# Altium PCB PCB2.PcbDoc
Units mil, origin at the board's own origin, x right, y up, seen from the top; angles counter-clockwise.
Board outline 3150 x 2559.06 mil, 2 copper layers (Top Layer, Bottom Layer); 69 components, 56 nets, 220 pads, 25 vias.
Unrouted connection lines stored in the file: 2.
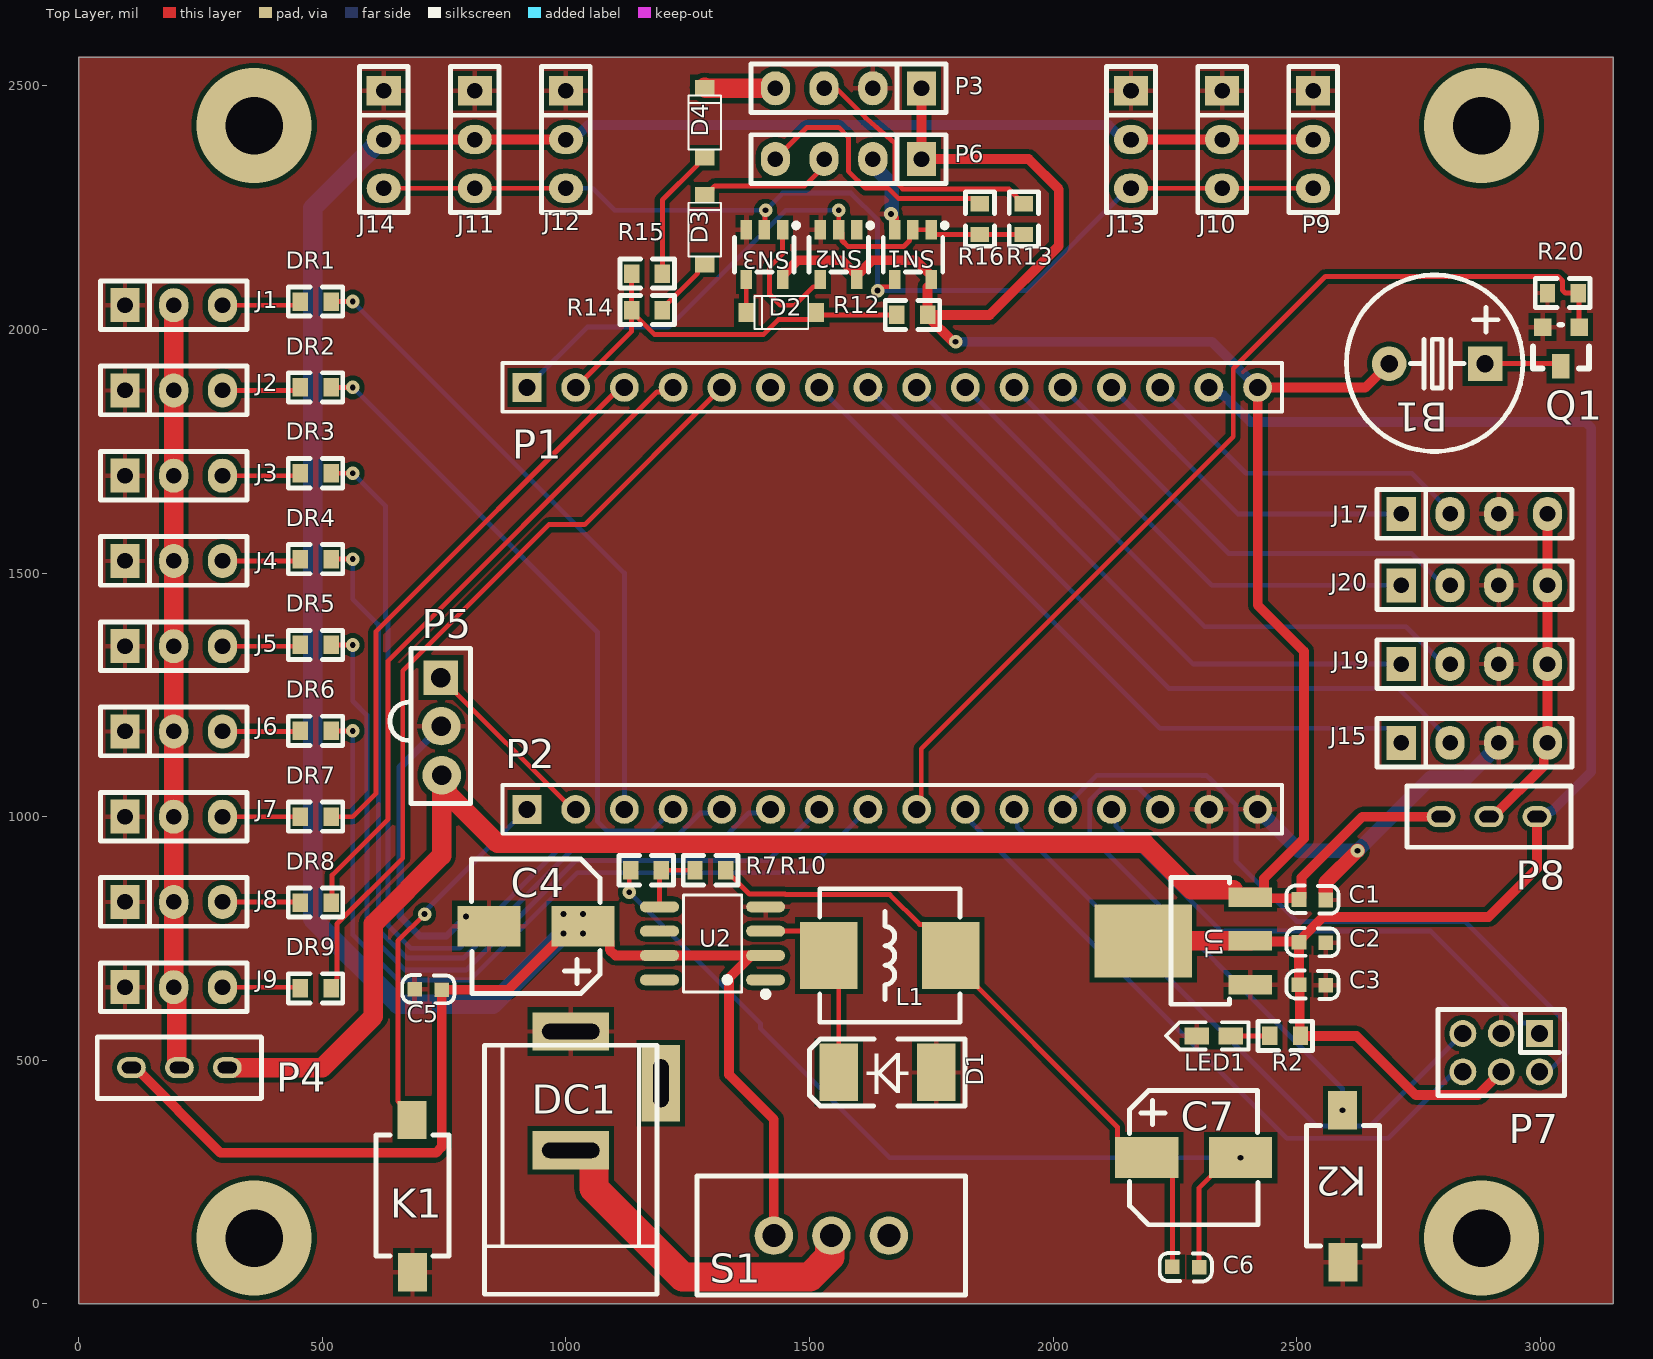
[diagram p0: Top Layer view]
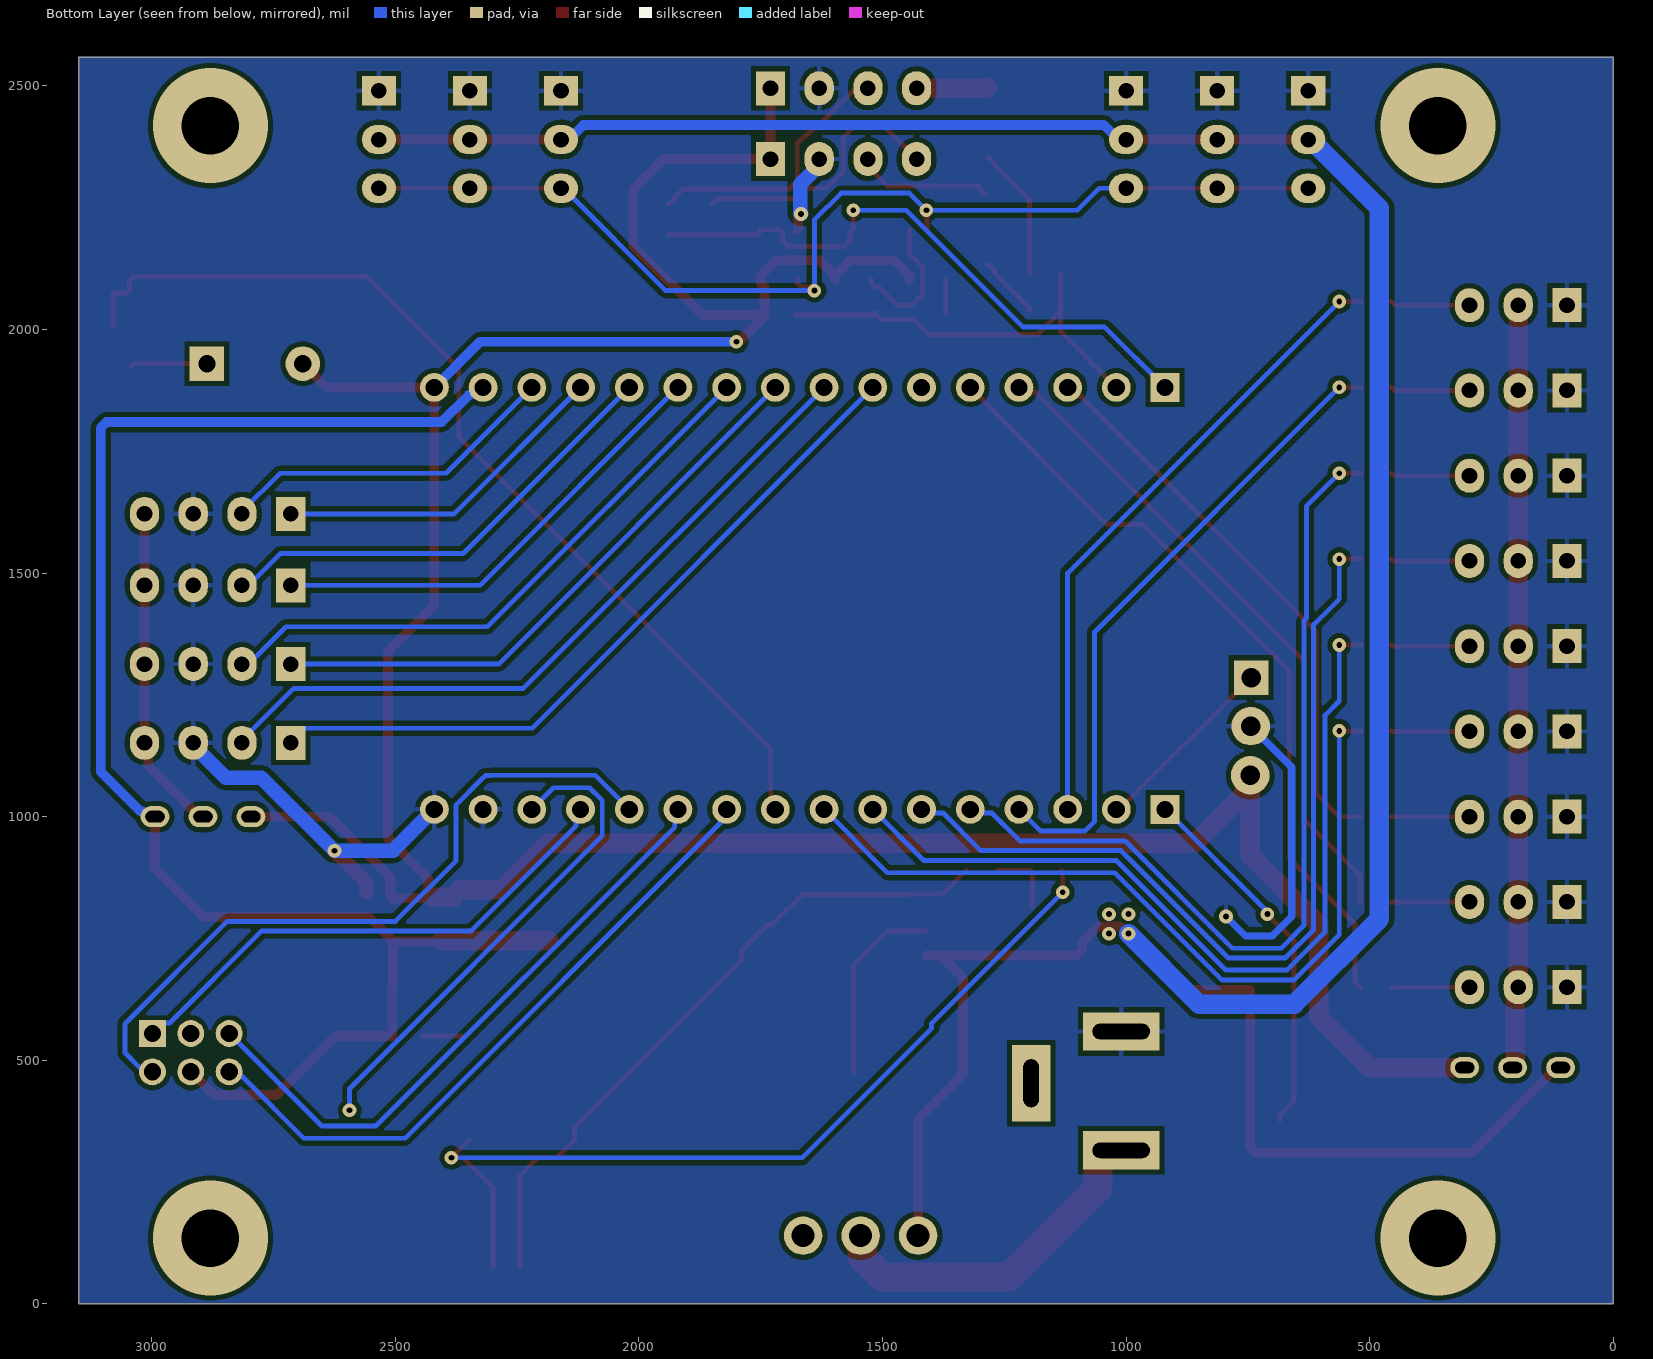
[diagram p1: Bottom Layer view, seen from below]

## Layer stack, top to bottom
Top Solder: solder mask 0.4, Solder Resist, Dk 3.5
Top Layer: signal copper 1.4
Dielectric 1: dielectric 12.6, FR-4, Dk 4.8
Bottom Layer: signal copper 1.4
Bottom Solder: solder mask 0.4, Solder Resist, Dk 3.5

## Board outline
0,0 0,2559.05 3150,2559.06 3150,0

## Design rules (kind name [scope] priority, off if disabled: settings)
Clearance [All] p1: gap=10 ignorepadtopadclearanceinfootprint=FALSE except(0: Arc-Hole Track-Hole SMDPad-Hole THPad-Hole Via-Hole Fill-Hole Poly-Hole Region-Hole Text-Hole)
PolygonConnect [All] p1: connectstyle=Relief reliefconductorwidth=10 reliefentries=4 polygonreliefangle="90 Angle" airgapwidth=10
RoomDefinition Sheet2 [InComponentClass('Sheet2')] p1: confinementstyle=ConfineIn formatcopy=TRUE lockcomponents=FALSE outline -1410,-2065 590,-2065 590,-1065 -1410,-1065
RoutingVias [All] p1: holewidth=28 width=50 viastyle="Through Hole" minholewidth=28 minwidth=50 maxholewidth=28 maxwidth=50
SolderMaskExpansion [All] p1: expansion=4 istentingtop=FALSE
Width [InNetClass('PWR')] p1: maxlimit=20 minlimit=20 preferedwidth=20
30 further rules are at their usual default settings.

## Components (designator, comment, footprint, x,y, rotation, side; value= is the part's Value field where it differs from the comment)
B1 "BEEP" "BEEP 5x9x5.5" 2886.85,1930 r180 top
C1 "104" 0603C 2560.21,828.65 r180 top
C2 "104" 0603C 2560.21,741.15 r180 top
C3 "104" 0603C 2560.21,653.65 r180 top
C4 "220uf" SMD-EC6.3X6.3X10 1035.82,775.02 r180 top
C5 "104" 0603C 745.21,644.65 r180 top
C6 "104" 0603C 2244.79,76.35 r0 top
C7 "220uf" SMD-EC6.3X6.3X10 2191.27,299.98 r0 top
D1 "SS34" SMA/DO-214AC 1755,475 r180 top
D2 "B5819W" SOD-123 1512.5,2035 r180 top
D3 "B5819W" SOD-123 1285,2135 r90 top
D4 "B5819W" SOD-123 1285,2355 r90 top
DC1 "DC_Socket" DC-005 1010,559.09 r270 top
DR1 "1K" 0603R 455,2057.5 r0 top
DR2 "1K" 0603R 455,1881.25 r0 top
DR3 "1K" 0603R 455,1705 r0 top
DR4 "1K" 0603R 455,1528.75 r0 top
DR5 "1K" 0603R 455,1352.5 r0 top
DR6 "1K" 0603R 455,1176.25 r0 top
DR7 "1K" 0603R 455,1000 r0 top
DR8 "1K" 0603R 455,823.75 r0 top
DR9 "1K" 0603R 455,647.5 r0 top
J1 "Pin HDR1X3" "Pin HDR1X3/2.54mm-S" 95,2050 r90 top
J2 "Pin HDR1X3" "Pin HDR1X3/2.54mm-S" 95,1875 r90 top
J3 "Pin HDR1X3" "Pin HDR1X3/2.54mm-S" 95,1700 r90 top
J4 "Pin HDR1X3" "Pin HDR1X3/2.54mm-S" 95,1525 r90 top
J5 "Pin HDR1X3" "Pin HDR1X3/2.54mm-S" 95,1350 r90 top
J6 "Pin HDR1X3" "Pin HDR1X3/2.54mm-S" 95,1175 r90 top
J7 "Pin HDR1X3" "Pin HDR1X3/2.54mm-S" 95,1000 r90 top
J8 "Pin HDR1X3" "Pin HDR1X3/2.54mm-S" 95,825 r90 top
J9 "Pin HDR1X3" "Pin HDR1X3/2.54mm-S" 95,650 r90 top
J10 "Pin HDR1X3" "Pin HDR1X3/2.54mm-S" 2347,2490 r0 top
J11 "Pin HDR1X3" "Pin HDR1X3/2.54mm-S" 813,2490 r0 top
J12 "Pin HDR1X3" "Pin HDR1X3/2.54mm-S" 1000,2490 r0 top
J13 "Pin HDR1X3" "Pin HDR1X3/2.54mm-S" 2160,2490 r0 top
J14 "Pin HDR1X3" "Pin HDR1X3/2.54mm-S" 626,2490 r0 top
J15 "Pin HDR1X4" "Pin HDR1X4/2.54mm-S" 2715,1151.67 r90 top
J17 "Pin HDR1X4" "Pin HDR1X4/2.54mm-S" 2715,1621.67 r90 top
J19 "Pin HDR1X4" "Pin HDR1X4/2.54mm-S" 2715,1313.33 r90 top
J20 "Pin HDR1X4" "Pin HDR1X4/2.54mm-S" 2715,1475 r90 top
K1 "KEY" SMD-3X6X2.5 685,375 r270 top
K2 "KEY" SMD-3X6X2.5 2595,395 r270 top
L1 "INDUCTOR" 0630L 1545,715 r0 top
LED1 "LED" LED-0603Y 2365,550 r180 top
P1 "Pin HDR1X16" "Pin HDR1X16/2.54mm-S" 920,1881.14 r0 top
P2 "Pin HDR1X16" "Pin HDR1X16/2.54mm-S" 920,1015 r0 top
P3 "Pin HDR1X4" "Pin HDR1X4/2.54mm-S" 1730,2495.24 r270 top
P4 "小开关" 小开关 305,461.38 r180 top
P5 "红外" 红外接收模块 743.4,1285.6 r270 top
P6 "Pin HDR1X4" "Pin HDR1X4/2.54mm-S" 1730,2350 r270 top
P7 "2X3" "2X3P PH2.0" 2998.74,555 r180 top
P8 "小开关" 小开关 2796.59,1023.62 r0 top
P9 "Pin HDR1X3" "Pin HDR1X3/2.54mm-S" 2534,2490 r0 top
Q1 "S9013 NPN" SOT-23 3045,1970 r180 top
R2 "1K" 0603R 2507.99,550 r180 top
R7 "2K" 0603R 1195.98,890 r180 top
R10 "6.2K" 0603R 1327.99,890 r180 top
R12 "10K" 0603R 1742.5,2030 r180 top
R13 "100R" 0603R 1940,2257.99 r270 top
R14 "100R" 0603R 1197.99,2040 r180 top
R15 "100R" 0603R 1197.99,2115 r180 top
R16 "100R" 0603R 1850,2257.99 r270 top
R20 "10K" 0603R 3015,2075 r0 top
S1 "SS-12D10" SS-12D10 1663.11,140 r180 top
SN1 "Component_1" SN74HC 1749.9,2102.63 r90 top
SN2 "Component_1" SN74HC 1597.4,2102.63 r90 top
SN3 "Component_1" SN74HC 1444.9,2102.63 r90 top
U1 "AMS1117" SOT223 2405,745 r90 top
U2 "TD1583(5V3A)" TD1583 1410,665 r90 top

## Footprints (in the part's own frame and the unit in brackets; to place one, negate y for a bottom-side part, rotate by r counter-clockwise, add the part's x,y. Pads: shape width x height; smd on the part's side, far side on the other; paste and mask are expansions set on the pad)
"2X3P PH2.0" [mm]
  rect 1.4x1.4 hole 0.9 mask+0.051: 1(0,0)
  round 1.4 hole 0.9 mask+0.051: 2(0,2) 3(2,0) 4(2,2) 5(4,0) 6(4,2)
  silkscreen extent -1.3,-1.25 5.3,3.25
0603C [mil]
  rect 30x30 smd: 1(0.21,-0.35) 2(55.21,-1.35)
  silkscreen extent -26,-30 81,28, body extent -1,-15 62,17, height 12
0603R [mm]
  rect 0.8x0.965 smd: 1(0,0) 2(1.6,0)
  silkscreen extent -0.64,-0.76 2.21,0.76, body extent -0.04,-0.41 1.56,0.41, height 0.45
0630L [mm]
  rect 3x3.5 smd: 1(-0.127,0) 2(6.223,0)
  silkscreen extent -0.61,-3.48 6.71,3.48, body extent -0.55,-3.05 6.4,3.55, height 3.05
"BEEP 5x9x5.5" [mm]
  rect 1.8x1.8 hole 0.9: 1(0,0)
  round 1.8 hole 0.9: 2(5,0)
  silkscreen extent -1.97,-4.62 7.23,4.57, body extent -1.96,-4.44 7.04,4.55, height 5.45
DC-005 [mm] "5.5X2.1mm"
  rect 2x4 hole 0.8 slot 3 at 90 deg: 1(0,0) 2(6.2,0)
  rect 4x2 hole 0.8 slot 2.5 at 0 deg: 3(2.7,4.7)
  silkscreen extent 0.72,-4.5 13.7,4.5, body extent -0.4,-4.52 13.65,4.78, height 11.2
LED-0603Y [mil]
  rect 50x35 smd: A(0,0) K(70,0)
  silkscreen extent -36,-28 133,28, body extent 4,-17 66,15, height 24
"Pin HDR1X3/2.54mm-S" [mil]
  rect 70x60 hole 32: 1(0,0)
  oval 70x60 hole 32: 2(0,-100) 3(0,-200)
  silkscreen extent -50,-250 50,50, body extent -50,-250 50,50, height 336
"Pin HDR1X4/2.54mm-S" [mil]
  rect 70x60 hole 32: 1(0,0)
  oval 70x60 hole 32: 2(0,-100) 3(0,-200) 4(0,-300)
  silkscreen extent -50,-350 50,50, body extent -50,-350 50,50, height 336
"Pin HDR1X16/2.54mm-S" [mm]
  rect 1.5x1.5 hole 0.9: 1(0,0)
  round 1.5 hole 0.9: 2(2.54,0) 3(5.08,0) 4(7.62,0) 5(10.16,0) 6(12.7,0) 7(15.24,0) 8(17.78,0) 9(20.32,0) 10(22.86,0) 11(25.4,0) 12(27.94,0) 13(30.48,0) 14(33.02,0) 15(35.56,0) 16(38.1,0)
  silkscreen extent -1.27,-1.27 39.37,1.27, body extent -1.27,-1.27 39.37,1.27, height 7.58
SMA/DO-214AC [mm] "塑封二极管"
  rect 2x3 smd: A(-0.127,0) K(4.953,0)
  silkscreen extent -1.63,-1.75 6.48,1.75, body extent 0.11,-1.35 4.71,1.35, height 2.4
SMD-3X6X2.5 [mm]
  rect 2x1.5 smd: 1(-0.059,-0.02) 3(7.874,0)
  silkscreen extent 0.73,-1.9 7.03,1.9, body extent -0.19,-1.78 7.81,1.72, height 2.59
SMD-EC6.3X6.3X10 [mm]
  rect 3.3x2.132 smd: 1(0.021,0) 2(4.921,0)
  silkscreen extent -0.88,-3.5 5.84,3.5, body extent -1.09,-3.3 5.91,3.3, height 5.4
SN74HC [mm]
  rect 1x0.6 smd mask+0.051: 1(2.6,0) 2(2.6,0.95) 3(2.6,1.9) 4(0,1.9) 5(0,0)
  silkscreen extent 0.4,-0.83 2.95,2.5
SOD-123 [mm] "塑封二极管"
  rect 0.8x1 smd: A(-0.051,0) K(3.607,0)
  silkscreen extent 0.38,-0.85 3.18,0.85, body extent -0.12,-0.89 3.73,0.81, height 1.43
SOT223 [mil]
  rect 40x90 smd: 1(-90,0) 2(0,0) 3(90,0)
  rect 150x200 smd: 2(0,220)
  silkscreen extent -130,43 130,163, body extent -130,-30 126,246, height 65
SOT-23 [mil]
  rect 36x36 smd: B(-35,-35) E(40,-35)
  rect 36x50 smd: C(3,45)
  silkscreen extent -55,-40 60,50, body extent -54,-48 60,62, height 47
SS-12D10 [mm]
  round 2 hole 1.2: 1(0,0) 2(3,0) 3(6,0)
  silkscreen extent -4,-3.1 10,3.1, body extent -3.95,-3.15 10.05,3.05, height 9.65
TD1583 [mil]
  oval 22.6x80.14 smd mask+2: 1(0,0) 2(50,0) 3(100,0) 4(150,0) 5(150,217.94) 6(100,217.94) 7(50,217.94) 8(0,217.94)
  silkscreen extent -35,-6 174,169
小开关 [mm]
  oval 1.5x1.1 hole 0.6 slot 1 at 0 deg mask+0.05: 1(0,-0.6) 2(2.5,-0.6) 3(5,-0.6)
  silkscreen extent -1.78,-2.19 6.78,1.01
红外接收模块 [mil]
  rect 71x71 hole 40 mask+2: 1(0,0)
  round 79 hole 40 mask+2: 2(99.7,0.7) 3(200.6,1.6)
  silkscreen extent -60,-105 259,61

## Part data
B1: "蜂鸣器"
C1 C2 C3 C5 C6: library part CAP, "无极性电容"
C4 C7: library part SMD_ECAP, "贴片电解电容"
D1 D2 D3 D4: library part "DIODE SCHOTTKY", "肖特基二极管"
DR1 DR2 DR3 DR4 DR5 DR6 DR7 DR8 DR9 R2 R7 R10 R12 R13 R14 R15 R16 R20: library part RES
P7: library part "2X3 PH3.0"
Q1: library part NPN, "NPN三极管"
U1: "三端稳压芯片"

## Via types
v1: diameter 28, hole 12, Top Layer to Bottom Layer, tented both sides, 21 vias
v2: diameter 236.22, hole 118.11, Top Layer to Bottom Layer, 4 vias

## Nets (pads, with @x,y where several pads share a name; then routed paths per layer and width w, separated by ;. In a path a pad name is that pad's centre, name@x,y a point inside that pad or via, vN(x,y) a via of type N, cw(c..) or ccw(c..) an arc to the next point about the centre after c; other vN are vias at no path point)
3.3V: C2.2 C3.2 P1.15 P7.4 P8.3 R2.1 U1.2 | length 3330.4
  Top Layer w20: U1.2@2405,745 2406.25,743.75 2503.75,743.75 C2.2 ; P7.4 2872.44,428.7 2744.49,428.7 2623.19,550 R2.1 2506.5,551.5 2506.5,653.5 C3.2 C2.2 ; P8.3 2993.43,893.43 2894,794 2554.22,794 2510,749.78 2510,747.5 C2.2
  Top Layer w40: U1.2@2185,745 U1.2@2405,745
  Bottom Layer w20: P1.15 2330.57,1881.14 2345.73,1865.98 2349.02,1865.98 2405,1810 3093.28,1810 3105,1798.28 3105,1092.78 3023.28,1011.07 3018.69,1011.07 3007.62,1000 P8.3
5V: B1.2 C1.2 C6.1 C7.1 L1.2 P1.16 P3.1 P4.1 P5.3 P6.1 P8.1 R10.1 R12.1 SN1.5 SN2.5 SN3.5 U1.3 | length 8020.4
  Top Layer w10: R10.1 1376.69,841.3 1449.66,841.3 1450.96,840 1665,840 1726.1,778.9 1735.94,778.9 1790,724.84 L1.2 1790,705.16 2132.13,363.03 2132.13,336.97 2169.09,300 C7.1 2208.03,300 2245,263.03 C6.1
  Top Layer w20: SN3.5 1444.9,2110.5 1476.71,2142.31 1565.59,2142.31 SN2.5@1597.4,2110.5 ; SN2.5 SN2.5@1597.4,2110.5 ; P3.1 P6.1 1950,2350 2011.72,2288.28 2011.72,2171.72 1870,2030 R12.1 ; v1(1800,1975) 1794.25,1975 1742.5,2026.75 R12.1 ; U1.3@2370,850 2370,845 U1.3@2380,835 ; U1.3@2423.28,835 2433.28,845 2433.28,873.28 2515,955 2515,1339.54 2420,1434.54 P1.16 2641.14,1881.14 B1.2 ; U1.3@2430,832.5 2502.5,832.5 C1.2 2510,835 2510,875 2635,1000 P8.1 ; SN2.5@1597.4,2110.5 1629.21,2142.31 1718.09,2142.31 1749.9,2110.5 SN1.5 1749.9,2094.76 1742.5,2087.36 R12.1
  Top Layer w40: P4.1 500,485 605,590 605,780 745,920 P5.3@745,1048.71 ; P5.3 756.29,1073.71 756.29,1048.71 860,945 2188.28,945 2283.28,850 U1.3@2370,850 ; U1.3@2380,835 U1.3@2423.28,835
  Bottom Layer w20: v1(1800,1975) 2326.14,1975 P1.16
BEEP: P2.9 Q1.B R20.2 | length 2056.8
  Top Layer w10: P2.9 1729.39,1024.39 1729.39,1139.39 2370,1780 2370,1920 2559,2109 3036.96,2109 3045.75,2100.21 3045.75,2080.86 3051.61,2075 R20.2 3080,2072.99 Q1.B
DAT: J10.3 J11.3 J12.3 J13.3 J14.3 P9.3 SN1.4 SN3.2 | length 2286
  Top Layer w10: J14.3 J11.3 J12.3 ; SN3.2 1408.75,2206.25 1408.75,2243.75 v1(1410,2245) ; v1(1640,2080) 1647.95,2087.94 1668.29,2087.94 1675.1,2094.76 SN1.4 ; J13.3 J10.3 P9.3
  Bottom Layer w10: J12.3 1055,2290 1100,2245 v1(1410,2245) 1445,2280 1585,2280 1640,2225 v1(1640,2080) 1945,2080 2155,2290 J13.3
DJ0: DR1.2 P2.3 | length 1317.9
  Top Layer w10: DR1.2 v1(562.5,2057.5)
  Bottom Layer w10: v1(562.5,2057.5) 1120,1500 P2.3
DJ1: DR2.2 P2.4 | length 1325.4
  Top Layer w10: DR2.2 v1(562.5,1881.25)
  Bottom Layer w10: v1(562.5,1881.25) 1064.53,1379.22 1064.53,990.47 1084.53,970.47 1175.47,970.47 P2.4
DJ2: DR3.2 P2.5 | length 1825.3
  Top Layer w10: DR3.2 v1(562.5,1705)
  Bottom Layer w10: v1(562.5,1705) 630,1637.5 630,1407.47 635,1402.47 635,776.57 681.57,730 781.72,730 1002.19,950.47 1218.44,950.47 1275.47,1007.5 1312.5,1007.5 P2.5
DJ3: DR4.2 P2.6 | length 1782.2
  Top Layer w10: DR4.2 v1(562.5,1528.75)
  Bottom Layer w10: v1(562.5,1528.75) 562.5,1446.68 615,1394.18 615,768.28 673.28,710 790,710 1010.47,930.47 1298.44,930.47 1375.47,1007.5 1412.5,1007.5 P2.6
DJ4: DR5.2 P2.7 | length 1743.2
  Top Layer w10: DR5.2 v1(562.5,1352.5)
  Bottom Layer w10: v1(562.5,1352.5) 562.5,1237.5 591.5,1208.5 591.5,763.5 670,685 795,685 1020,910 1415,910 P2.7
DJ5: DR6.2 P2.8 | length 1704
  Top Layer w10: DR6.2 v1(562.5,1176.25)
  Bottom Layer w10: v1(562.5,1176.25) 562.5,757.5 655,665 803.28,665 1023.28,885 1490,885 P2.8
DJ6: DR7.2 P1.3 | length 1161.8
  Top Layer w10: DR7.2 562.5,1000 610,1047.5 610,1380 1111.14,1881.14 P1.3
DJ7: DR8.2 P1.4 | length 1362.1
  Top Layer w10: DR8.2 520,825.76 520,880 635,995 635,1320 1186.76,1871.76 1210.61,1871.76 P1.4
DJ8: DR9.2 P1.5 | length 1608.8
  Top Layer w10: DR9.2 528.74,658.25 528.74,666.09 530,667.35 530,779.8 665,914.8 665,1299.41 965.12,1599.53 1038.39,1599.53 P1.5
GND: C1.1 C2.1 C3.1 C4.2 C5.2 C6.2 C7.2 D1.A DC1.1 J1.1 J2.1 J3.1 J4.1 J5.1 J6.1 J7.1 J8.1 J9.1 J10.1 J11.1 J12.1 J13.1 J14.1 J15.3 J17.3 J19.3 J20.3 K1.3 K2.3 LED1.K P2.15 P2.16 P3.2 P5.2 P6.2 P7.3 P9.1 Q1.E R7.2 R20.1 SN1.3 SN2.3 SN3.3 U1.1 U2.4 | length 3354.4
  Top Layer w10: v1(1130,845) 1130,887.01 R7.2 ; C6.2 2300,237.99 2362.01,300 v1(2385,300) C7.2@2348.03,336.97
  Top Layer w20: v1(1667.34,2237.34) 1667.34,2235.18 1673.29,2229.23 1673.29,2206.81 SN1.3
  Top Layer w30: 2560,845 2560,865 v1(2625,930)
  Bottom Layer w10: v1(1130,845) 1399.22,575.78 1399.22,565.78 1665,300 v1(2385,300) ; P6.2@1630,2345 P6.2
  Bottom Layer w15: P5.2 660,1101.8 660,795 700,755 755,755 v1(795,795)
  Bottom Layer w30: P6.2@1630,2345 1630,2336.88 1668.71,2298.17 1668.71,2238.71 v1(1667.34,2237.34) ; P2.16 2505,930 v1(2625,930) 2775,1080 2848.33,1080 2915,1146.67 J15.3
IR: P2.2 P5.1 | length 388.7
  Top Layer w10: P5.1 1014,1015 P2.2
KEY1: K1.1 P2.1 | length 759.6
  Top Layer w10: K1.1 684.21,387.16 655,416.37 655,745 v1(710,800)
  Bottom Layer w10: v1(710,800) 713.44,803.44 713.44,808.44 P2.1
KEY2: K2.1 P2.14 | length 1024.8
  Bottom Layer w10: P2.14 2175.47,1059.53 2101.56,1059.53 2075.47,1033.44 2075.47,960.46 2594.21,441.72 v1(2594.21,397.31)
NetB1_1: B1.1 Q1.C | length 157.2
  Top Layer w10: B1.1 3037,1930 Q1.C
NetD1_K: D1.K L1.1 U2.3 | length 399
  Top Layer w10: U2.3 1490,765 L1.1 1560,695 D1.K
NetD2_K: D2.K SN3.4 | length 67.8
  Top Layer w10: SN3.4 1370.1,2035.4 D2.K
NetD3_A: D3.A R14.1 | length 131.3
  Top Layer w10: R14.1 1197.99,2043.25 1270.32,2115.57 1270.32,2122.25 1281.06,2133 D3.A
NetD3_K: D3.K P6.3 | length 284.8
  Top Layer w10: D3.K 1288.94,2277 1299.69,2287.75 1299.69,2289.14 1305.54,2295 1490,2295 1530,2335 P6.3
NetD4_A: D4.A R15.1 | length 276.3
  Top Layer w10: R15.1 1197.99,2265.99 1270.32,2338.31 1270.32,2342.25 1281.06,2353 D4.A
NetD4_K: D4.K P3.4 | length 145.7
  Top Layer w40: D4.K 1286.76,2495.24 P3.4
NetDR1_1: DR1.1 J1.3 | length 163.1
  Top Layer w10: J1.3 447.5,2050 DR1.1
NetDR2_1: DR2.1 J2.3 | length 162.6
  Top Layer w10: J2.3 448.75,1875 DR2.1
NetDR3_1: DR3.1 J3.3 | length 162.1
  Top Layer w10: J3.3 450,1700 DR3.1
NetDR4_1: DR4.1 J4.3 | length 161.6
  Top Layer w10: J4.3 451.25,1525 DR4.1
NetDR5_1: DR5.1 J5.3 | length 161
  Top Layer w10: J5.3 452.5,1350 DR5.1
NetDR6_1: DR6.1 J6.3 | length 160.5
  Top Layer w10: J6.3 453.75,1175 DR6.1
NetDR7_1: DR7.1 J7.3 | length 160
  Top Layer w10: J7.3 DR7.1
NetDR8_1: DR8.1 J8.3 | length 160.5
  Top Layer w10: J8.3 453.75,825 DR8.1
NetDR9_1: DR9.1 J9.3 | length 161
  Top Layer w10: J9.3 452.5,650 DR9.1
NetLED1_A: LED1.A R2.2 | length 80
  Top Layer w10: LED1.A R2.2
NetP3_3: P3.3 R13.1 | length 553.7
  Top Layer w10: P3.3 1550.62,2495.24 1554.76,2495.24 1615.39,2434.61 1618.29,2431.71 1675,2382.8 1675,2305 1691.26,2288.74 1909.25,2288.74 1926,2271.99 1926,2268.74 1936.75,2257.99 R13.1
NetP6_4: P6.4 R16.1 | length 553
  Top Layer w10: P6.4 1472.45,2392.45 1495,2415 1560,2415 1580,2395 1580,2325 1615,2290 1661.72,2290 1682.98,2268.74 1839.25,2268.74 R16.1
NetR7_1: R7.1 R10.2 U2.5 | length 145.6
  Top Layer w10: U2.5 1192.06,886.08 R7.1 R10.2
NetSN2_4: SN2.4 SN3.1 | length 284.2
  Top Layer w10: SN3.1 1444.9,2155.34 1418.09,2128.53 1418.09,2071.91 1440,2050 1469.97,2050 1507.91,2087.94 1515.79,2087.94 1522.6,2094.76 SN2.4
PS1: P2.13 P7.1 | length 1083.9
  Bottom Layer w10: P2.13 2128.99,1006.01 2128.99,981.01 2345,765 2775,765 2963.7,576.3 2977.44,576.3 P7.1
PS2: P2.12 P7.2 | length 1475
  Bottom Layer w10: P2.12 2090,1085 2305,1085 2305.6,1084.4 2315.6,1084.4 2323.33,1076.67 2375.47,1024.53 2375.47,909.53 2500,785 2845.07,785 3055,575.07 3055,515 3024.89,484.89 3007.37,484.89 P7.2
PS6: P2.11 P7.5 | length 1286.8
  Bottom Layer w10: P2.11 1926.49,1008.51 1926.49,978.51 2540,365 2651.26,365 P7.5
PS7: P2.10 P7.6 | length 1366.1
  Bottom Layer w10: P2.10 1820,1001.73 1833.99,987.74 1833.99,986.01 2480,340 2687.84,340 2815.47,467.63 2832.63,467.63 P7.6
PWR: DC1.2 S1.2 | length 741.6
  Top Layer w60: DC1.2 1048.32,315 1057.69,305.63 1057.69,237.31 1240,55 1500.48,55 1541.41,95.93 1541.41,136.41 S1.2
RXD1: D2.A P1.2 R12.2 R14.2 R15.2 | length 868.4
  Top Layer w10: P1.2 1135,1996.14 R14.2@1135,2036.75 ; R15.2 R14.2 R14.2@1135,2036.75 ; R12.2 1519.5,2030 D2.A 1514.5,2031.06 1503.75,2020.32 1436.15,2020.32 1405.83,1990 1181.75,1990 R14.2@1135,2036.75
SSA3: J15.1 P1.7 | length 1500.1
  Bottom Layer w10: P1.7 2219.47,1181.67 2690,1181.67 2715,1156.67 J15.1
SSA4: J19.1 P1.9 | length 1230.2
  Bottom Layer w10: P1.9 2287.81,1313.33 J19.1
SSA5: J20.1 P1.11 | length 963.2
  Bottom Layer w10: P1.11 2326.14,1475 J20.1
SSA6: J17.1 P1.13 | length 702.5
  Bottom Layer w10: P1.13 2379.47,1621.67 J17.1
SSD3: J15.2 P1.8 | length 1500.1
  Bottom Layer w10: P1.8 2237.81,1263.33 2708.33,1263.33 2815,1156.67 J15.2
SSD4: J19.2 P1.10 | length 1230.2
  Bottom Layer w10: P1.10 2311.14,1390 2724.55,1390 2786.65,1327.9 2800.43,1327.9 J19.2
SSD5: J20.2 P1.12 | length 963.2
  Bottom Layer w10: P1.12 2361.14,1540 2736.21,1540 2786.65,1489.57 2800.43,1489.57 J20.2
SSD6: J17.2 P1.14 | length 705.4
  Bottom Layer w10: P1.14 2396.14,1705 2736.67,1705 2815,1626.67 J17.2
TXD1: P1.1 R13.2 R16.2 SN1.1 SN1.2 SN2.2 | length 1263.4
  Top Layer w10: v1(1560,2245) SN2.2 1566.81,2198.19 1566.81,2182.88 1579.38,2170.31 1693.12,2170.31 1705.69,2182.88 1705.69,2198.19 SN1.2 SN1.1 1749.9,2201.81 1756.71,2195 R16.2 R13.2
  Bottom Layer w10: P1.1 1043.86,2005 1211.01,2005 1451.01,2245 v1(1560,2245)
VBAT: C4.1 C5.1 J10.2 J11.2 J12.2 J13.2 J14.2 P4.3 P9.2 S1.3 U2.2 U2.7 | length 6667.6
  Top Layer w20: P4.3 116.03,485 291.03,310 733.28,310 745,321.72 C5.1 880.01,645 881.01,644 1012.01,775 C4.1 1057.99,775 1089.96,743.03 1089.96,726.72 1101.68,715 U2.2@1381.23,715 ; J14.2 J11.2 J12.2 ; U2.2 U2.2@1381.23,715 ; S1.3 1426.89,378.45 1335,470.34 1335,668.77 U2.2@1381.23,715 ; J13.2 J10.2 P9.2
  Bottom Layer w20: J14.2@621,2390 J14.2 ; J12.2 1015.82,2390 1045.82,2420 2114.18,2420 2144.18,2390 J13.2
  Bottom Layer w40: J14.2@621,2390 480,2249 480,790 655,615 850,615 v1(995,760)
  other v1: 1035,760 995,800 1035,800
VCC_SENSOR: J15.4 J17.4 J19.4 J20.4 P8.2 | length 677.6
  Top Layer w20: P8.2@2893.43,1000 P8.2 2902.87,1000 3007.35,1104.47 3007.35,1144.01 J15.4 J19.4 J20.4 J17.4
VCC_SERVOR: J1.2 J2.2 J3.2 J4.2 J5.2 J6.2 J7.2 J8.2 J9.2 P4.2 | length 1569.8
  Top Layer w40: J1.2 J2.2 J3.2 J4.2 J5.2 J6.2 J7.2 J8.2 J9.2 200.79,644.21 200.79,490.79 P4.2
pads on no net: DC1.3 P1.6 S1.1 SN2.1 U2.1 U2.6 U2.8
copper on no net:
  other v2: 360,135 2879.69,135 360,2418.46 2879.69,2418.46

## Polygon pours and split planes (outlines as drawn)
GND on Bottom Layer "NONET_L-01_P-001" (solid, pour order 2): 0,0 0,2560 3150,2560 3150,0
GND on Top Layer "NONET_L-01_P-001" (solid, pour order 1): 0,0 3150,0 3150,2560 0,2560

## Silkscreen, mask and mechanical layers (free items; w line width, h text height)
Mechanical 1:
  lines w10: 0,0 0,2559.06 3150,2559.06 3150,0 3149.61,0 0,0

## Dimensions
0,0 to 3149.61,0 on Mechanical 1